# Altium PCB WCH_hairDrierCore_V1.5.PcbDoc (part 2 of 7)
Units mil, origin at the board's own origin, x right, y up, seen from the top; angles counter-clockwise.
Board outline 1683.54 x 992.13 mil, 4 copper layers (Top Layer, Mid-Layer 1, Mid-Layer 2, Bottom Layer); 84 components, 65 nets, 249 pads, 160 vias.
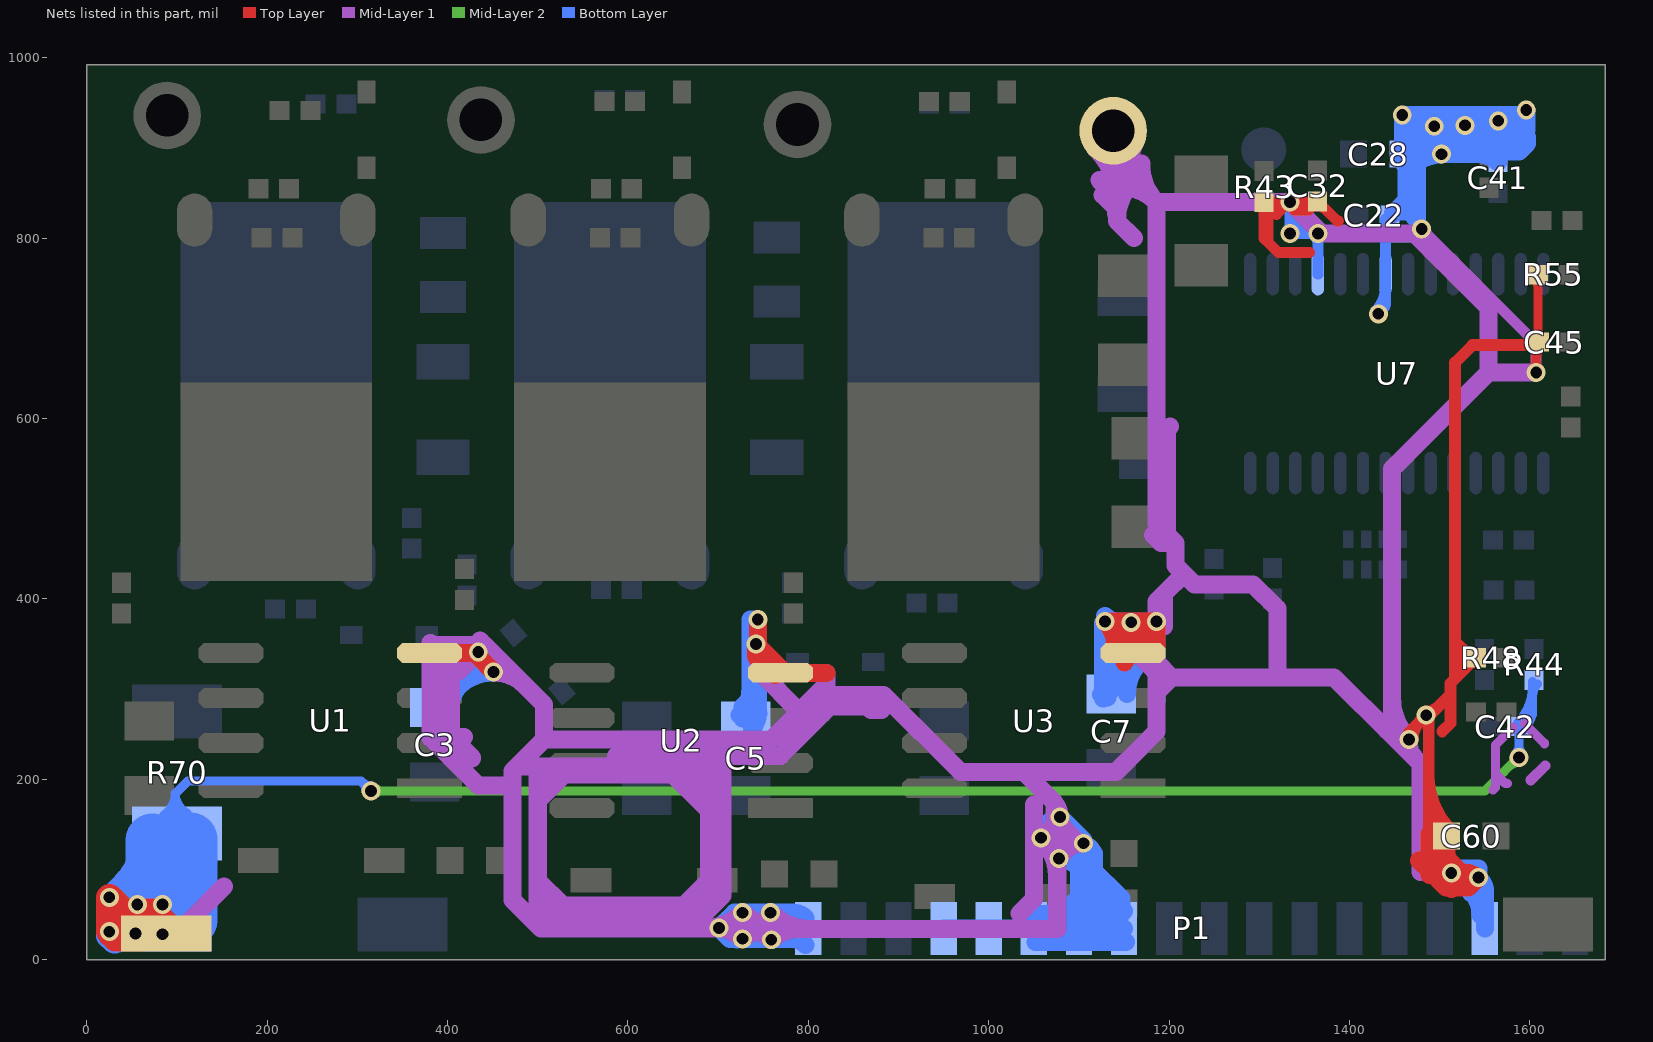
[diagram p4: the nets of this part, all layers, seen from the top]

## Via types
v1: diameter 21, hole 13, Top Layer to Bottom Layer, tented both sides, 155 vias
v2: diameter 25, hole 15, Top Layer to Bottom Layer, tented both sides, 5 vias

## Nets (pads, with @x,y where several pads share a name; then routed paths per layer and width w, separated by ;. In a path a pad name is that pad's centre, name@x,y a point inside that pad or via, vN(x,y) a via of type N, cw(c..) or ccw(c..) an arc to the next point about the centre after c; other vN are vias at no path point) (continued)
GND: C3.2 C5.2 C7.2 C22.2 C28.2 C32.2 C41.2 C42.1 C45.1 C60.2 P1.3 P1.11 P1.12 P1.13 P1.14 P1.15 P1.18 pad.0@88,29 pad.0@88,39 pad.1@1138,919 R43.1 R44.1 R48.1 R55.2 R70.1 U1.4 U2.4 U3.4 U7.4 U7.7 | length 35226.6
  Top Layer w10: 1496,96 1509,96 1524,96 ; v1@1607,655 1607,681.49 C45.1@1610.14,684.63 ; C45.1@1608.78,685.98 R55.2@1608.78,759.37 ; 1499.72,96 cw(c1499.72,82.72) v1@1509.11,92.11 ; 1499.72,96 ccw(c1499.72,109.28) v1@1509.11,99.89 ; 1499.72,96 cw(c1499.72,82.72) v1@1509.11,92.11 ; 1499.72,96 ccw(c1499.72,109.28) v1@1509.11,99.89 ; 1499.72,96 ccw(c1499.72,109.28) v1@1509.11,99.89 ; 1499.72,96 cw(c1499.72,82.72) v1@1509.11,92.11 ; v1@1517.4,92.7 cw(c1524,87.75) 1524,96 ; v1@1517.4,92.7 cw(c1524,87.75) 1524,96 ; v1@1517.4,92.7 cw(c1524,87.75) 1524,96 ; v1@1517.4,99.3 ccw(c1524,104.25) 1524,96 ; v1@1517.4,99.3 ccw(c1524,104.25) 1524,96 ; v1@1517.4,99.3 ccw(c1524,104.25) 1524,96 ; v1@1603.11,654.89 ccw(c1593.72,664.28) 1607,664.28 ; v1@1603.11,654.89 ccw(c1593.72,664.28) 1607,664.28 ; v1@1603.11,654.89 ccw(c1593.72,664.28) 1607,664.28 ; R55.2@1604.8,755.39 cw(c1595.19,745.78) 1608.79,745.78 ; R55.2@1604.8,755.39 cw(c1595.19,745.78) 1608.79,745.78 ; R55.2@1604.8,755.39 cw(c1595.19,745.78) 1608.79,745.78 ; C45.1@1605.65,688.61 ccw(c1598.08,696.18) 1608.78,696.18 ; C45.1@1605.65,688.61 ccw(c1598.08,696.18) 1608.78,696.18 ; C45.1@1605.65,688.61 ccw(c1598.08,696.18) 1608.78,696.18 ; 1607,664.28 ccw(c1620.28,664.28) v1@1610.89,654.89 ; 1607,664.28 ccw(c1620.28,664.28) v1@1610.89,654.89 ; 1607,664.28 ccw(c1620.28,664.28) v1@1610.89,654.89 ; 1607,664.69 cw(c1629.57,664.69) C45.1@1613.61,680.65 ; 1607,664.69 cw(c1629.57,664.69) C45.1@1613.61,680.65 ; 1607,664.69 cw(c1629.57,664.69) C45.1@1613.61,680.65 ; 1608.79,700.26 ccw(c1625.26,700.26) C45.1@1613.61,688.61 ; 1608.79,700.26 ccw(c1625.26,700.26) C45.1@1613.61,688.61 ; 1608.79,700.26 ccw(c1625.26,700.26) C45.1@1613.61,688.61 ; 1608.78,745.78 cw(c1622.38,745.78) R55.2@1612.77,755.39 ; 1608.78,745.78 cw(c1622.38,745.78) R55.2@1612.77,755.39 ; 1608.78,745.78 cw(c1622.38,745.78) R55.2@1612.77,755.39
  Top Layer w12: 1305.37,810.63 R43.1@1305.37,840.13 ; R43.1@1312,833 1309.5,830.5 1309.5,795.5 ; 1319,826 1320,827 ; v1@1339,835.13 v1(1334,840.13) ; 1356,784 1321,784 1309.5,795.5 ; C32.2@1363.98,840.13 1320,840.13 ; 1388,819 1386.41,819 C32.2@1364.63,840.79 C32.2@1354.84,831 ; R43.1@1302.1,836.36 cw(c1294.19,828.45) 1305.37,828.45 ; R43.1@1302.1,836.36 cw(c1294.19,828.45) 1305.37,828.45 ; R43.1@1302.1,836.36 cw(c1294.19,828.45) 1305.37,828.45 ; 1305.37,828.45 cw(c1316.55,828.45) R43.1@1308.64,836.36 ; 1305.37,828.45 cw(c1316.55,828.45) R43.1@1308.64,836.36 ; 1305.37,828.45 cw(c1316.55,828.45) R43.1@1308.64,836.36 ; R43.1@1305.37,840.13 1305.37,799.63 1309.5,795.5 ; R43.1@1305.37,840.13 1320,840.13 ; R43.1@1305.37,840.13 1320,840.13 ; R43.1@1305.37,840.13 v1(1334,840.13) ; R43.1@1305.37,840.13 v1(1334,840.13) ; R43.1@1308.64,836.86 cw(c1316.55,828.96) 1316.55,840.13 ; R43.1@1308.64,836.86 cw(c1316.55,828.96) 1316.55,840.13 ; R43.1@1308.64,836.86 cw(c1316.55,828.96) 1316.55,840.13 ; R43.1@1308.64,836.86 cw(c1316.55,828.96) 1316.55,840.13 ; R43.1@1308.64,836.86 cw(c1316.55,828.96) 1316.55,840.13 ; R43.1@1308.64,836.86 cw(c1316.55,828.96) 1316.55,840.13 ; R43.1@1308.64,836.86 cw(c1316.55,828.96) 1316.55,840.13 ; R43.1@1308.64,836.86 cw(c1316.55,828.96) 1316.55,840.13 ; R43.1@1308.64,836.86 cw(c1316.55,828.96) 1316.55,840.13 ; R43.1@1308.64,836.86 cw(c1316.55,828.96) 1316.55,840.13 ; R43.1@1308.64,836.86 cw(c1316.55,828.96) 1316.55,840.13 ; R43.1@1308.64,836.86 cw(c1316.55,828.96) 1316.55,840.13 ; R43.1@1308.64,843.41 ccw(c1316.55,851.31) 1316.55,840.13 ; R43.1@1308.64,843.41 ccw(c1316.55,851.31) 1316.55,840.13 ; R43.1@1308.64,843.41 ccw(c1316.55,851.31) 1316.55,840.13 ; R43.1@1308.64,843.41 ccw(c1316.55,851.31) 1316.55,840.13 ; R43.1@1308.64,843.41 ccw(c1316.55,851.31) 1316.55,840.13 ; R43.1@1308.64,843.41 ccw(c1316.55,851.31) 1316.55,840.13 ; R43.1@1308.64,843.41 ccw(c1316.55,851.31) 1316.55,840.13 ; R43.1@1308.64,843.41 ccw(c1316.55,851.31) 1316.55,840.13 ; R43.1@1308.64,843.41 ccw(c1316.55,851.31) 1316.55,840.13 ; R43.1@1308.64,843.41 ccw(c1316.55,851.31) 1316.55,840.13 ; R43.1@1308.64,843.41 ccw(c1316.55,851.31) 1316.55,840.13 ; R43.1@1308.64,843.41 ccw(c1316.55,851.31) 1316.55,840.13 ; 1320,827 1333.14,840.13 v1(1334,840.13) ; 1320,827 1320,840.13 ; 1323.14,840.13 cw(c1323.14,829.27) v1@1330.82,836.95 ; 1323.14,840.13 ccw(c1323.14,851) v1@1330.82,843.32 ; 1323.14,840.13 cw(c1323.14,829.27) v1@1330.82,836.95 ; 1323.14,840.13 ccw(c1323.14,851) v1@1330.82,843.32 ; 1323.14,840.13 cw(c1323.14,829.27) v1@1330.82,836.95 ; 1323.14,840.13 ccw(c1323.14,851) v1@1330.82,843.32 ; 1323.14,840.13 cw(c1323.14,829.27) v1@1330.82,836.95 ; 1323.14,840.13 ccw(c1323.14,851) v1@1330.82,843.32 ; 1323.14,840.13 cw(c1323.14,829.27) v1@1330.82,836.95 ; 1323.14,840.13 ccw(c1323.14,851) v1@1330.82,843.32 ; 1323.14,840.13 cw(c1323.14,829.27) v1@1330.82,836.95 ; 1323.14,840.13 ccw(c1323.14,851) v1@1330.82,843.32 ; 1323.14,840.13 cw(c1323.14,829.27) v1@1330.82,836.95 ; 1323.14,840.13 ccw(c1323.14,851) v1@1330.82,843.32 ; 1323.14,840.13 cw(c1323.14,829.27) v1@1330.82,836.95 ; 1323.14,840.13 ccw(c1323.14,851) v1@1330.82,843.32 ; 1323.14,840.13 cw(c1323.14,829.27) v1@1330.82,836.95 ; 1323.14,840.13 ccw(c1323.14,851) v1@1330.82,843.32 ; 1323.14,840.13 cw(c1323.14,829.27) v1@1330.82,836.95 ; 1323.14,840.13 ccw(c1323.14,851) v1@1330.82,843.32 ; 1323.14,840.13 ccw(c1323.14,851) v1@1330.82,843.32 ; 1323.14,840.13 cw(c1323.14,829.27) v1@1330.82,836.95 ; 1323.14,840.13 ccw(c1323.14,851) v1@1330.82,843.32 ; 1323.14,840.13 cw(c1323.14,829.27) v1@1330.82,836.95 ; 1323.14,840.13 ccw(c1323.14,851) v1@1330.82,843.32 ; 1323.14,840.13 cw(c1323.14,829.27) v1@1330.82,836.95 ; 1323.14,840.13 ccw(c1323.14,851) v1@1330.82,843.32 ; 1323.14,840.13 cw(c1323.14,829.27) v1@1330.82,836.95 ; 1323.14,840.13 ccw(c1323.14,851) v1@1330.82,843.32 ; 1323.14,840.13 cw(c1323.14,829.27) v1@1330.82,836.95 ; v1@1337.18,836.95 cw(c1344.86,829.27) 1344.86,840.13 ; v1@1337.18,836.95 cw(c1344.86,829.27) 1344.86,840.13 ; v1@1337.18,836.95 cw(c1344.86,829.27) 1344.86,840.13 ; v1@1337.18,843.32 ccw(c1344.86,851) 1344.86,840.13 ; v1@1337.18,843.32 ccw(c1344.86,851) 1344.86,840.13 ; v1@1337.18,843.32 ccw(c1344.86,851) 1344.86,840.13 ; v1@1338.12,841.94 ccw(c1354.84,849.25) C32.2@1354.84,831 ; v1@1338.12,841.94 ccw(c1354.84,849.25) C32.2@1354.84,831 ; v1@1338.12,841.94 ccw(c1354.84,849.25) C32.2@1354.84,831 ; v1@1339,831 ccw(c1339,856.94) C32.2@1360.75,842.8 ; v1@1339,831 ccw(c1339,856.94) C32.2@1360.75,842.8 ; v1@1339,831 ccw(c1339,856.94) C32.2@1360.75,842.8 ; v1@1339,831 C32.2@1354.84,831 ; 1353.1,840.13 ccw(c1353.1,851.81) C32.2@1361.36,843.55 ; 1353.1,840.13 ccw(c1353.1,851.81) C32.2@1361.36,843.55 ; 1353.1,840.13 ccw(c1353.1,851.81) C32.2@1361.36,843.55 ; 1353.8,840.13 cw(c1353.8,829.45) C32.2@1361.36,837.01 ; 1353.8,840.13 cw(c1353.8,829.45) C32.2@1361.36,837.01 ; 1353.8,840.13 cw(c1353.8,829.45) C32.2@1361.36,837.01 ; C32.2@1364.63,835.65 cw(c1364.63,823.25) C32.2@1373.4,832.02 ; C32.2@1364.63,835.65 cw(c1364.63,823.25) C32.2@1373.4,832.02 ; C32.2@1364.63,835.65 cw(c1364.63,823.25) C32.2@1373.4,832.02
  Top Layer w13: v1(1466,244) 1466,252 v1(1485,271) ; 1488,140.5 1488,270 1512,294 ; 1503,253 1512,262 1512,294 ; 1517,311.5 1517,353 ; R48.1@1540.14,334.63 R48.1@1529.75,324.25 ; C45.1@1607,681.49 1536.49,681.49 1517,662 1517,353 ; v1@1470,244 cw(c1498.97,244) v1@1478.49,264.49 ; v1@1470,244 cw(c1498.97,244) v1@1478.49,264.49 ; v1@1470,244 cw(c1498.97,244) v1@1478.49,264.49 ; v1@1482.17,268.17 cw(c1468.1,254.1) 1488,254.1 ; v1@1482.17,268.17 cw(c1468.1,254.1) 1488,254.1 ; v1@1482.17,268.17 cw(c1468.1,254.1) 1488,254.1 ; v1@1485,275 ccw(c1485,294.31) 1498.66,280.66 ; v1@1485,275 ccw(c1485,294.31) 1498.66,280.66 ; v1@1485,275 ccw(c1485,294.31) 1498.66,280.66 ; 1488,141.83 ccw(c1512.33,141.83) C60.2@1495.13,124.63 ; 1488,141.83 ccw(c1512.33,141.83) C60.2@1495.13,124.63 ; 1488,141.83 ccw(c1512.33,141.83) C60.2@1495.13,124.63 ; 1488,173.21 ccw(c1543.71,173.21) C60.2@1504.32,133.82 ; 1488,173.21 ccw(c1543.71,173.21) C60.2@1504.32,133.82 ; 1488,173.21 ccw(c1543.71,173.21) C60.2@1504.32,133.82 ; 1488,204.6 ccw(c1575.1,204.6) C60.2@1513.51,143.01 ; 1488,204.6 ccw(c1575.1,204.6) C60.2@1513.51,143.01 ; 1488,204.6 ccw(c1575.1,204.6) C60.2@1513.51,143.01 ; 1512,294 1512,306.5 R48.1@1529.75,324.25 ; 1517,353 1529.75,340.25 R48.1@1529.75,324.25 ; 1525.31,344.69 ccw(c1539.63,359.02) R48.1@1539.63,338.76 ; 1525.31,344.69 ccw(c1539.63,359.02) R48.1@1539.63,338.76 ; 1525.31,344.69 ccw(c1539.63,359.02) R48.1@1539.63,338.76 ; R48.1@1532.22,326.72 ccw(c1524.31,334.63) R48.1@1535.5,334.63 ; R48.1@1532.22,326.72 ccw(c1524.31,334.63) R48.1@1535.5,334.63 ; R48.1@1532.22,326.72 ccw(c1524.31,334.63) R48.1@1535.5,334.63 ; 1592.09,681.5 ccw(c1592.09,702.17) C45.1@1606.71,687.55 ; 1592.09,681.5 ccw(c1592.09,702.17) C45.1@1606.71,687.55 ; 1592.09,681.5 ccw(c1592.09,702.17) C45.1@1606.71,687.55
  Top Layer w20: U1.4@380,340 433,340 433,337 v1(451,319) ; v1@744,343 v1(744,377) ; 820,318 U2.4@769,318 ; 1140,364 1140,352 ; U3.4@1158,342 v1(1158,374) ; U3.4@1158,350 1154,350 1137.5,366.5 v1(1129,375) 1174,375 ; U3.4@1186,342 v1@1186,374 ; 1477,110 1489,98 ; 1489,139.5 1489,98 ; 1496,105 C60.2@1496,125 ; C60.2@1496,132.5 C60.2@1496,125 ; v1@1507.5,96.5 1507.5,113 ; C60.2@1507.5,126 1496,114.5 ; C60.2@1507.5,142 1507.5,113 ; v1@1518,102 1529,91 v1(1543,91) ; v1@742.5,350 ccw(c777.51,350) U2.4@752.75,325.25 ; v1@742.5,350 ccw(c777.51,350) U2.4@752.75,325.25 ; v1@742.5,350 ccw(c777.51,350) U2.4@752.75,325.25 ; U2.4@769,318 769,323 v1(742,350) 742,336 760,318 U2.4@769,318 ; v1@1128.67,374.63 cw(c1106.49,349.51) U3.4@1140,349.51 ; v1@1128.67,374.63 cw(c1106.49,349.51) U3.4@1140,349.51 ; v1@1128.67,374.63 cw(c1106.49,349.51) U3.4@1140,349.51 ; v1@1128.85,374.52 cw(c1124.23,359.44) 1140,359.44 ; v1@1128.85,374.52 cw(c1124.23,359.44) 1140,359.44 ; v1@1128.85,374.52 cw(c1124.23,359.44) 1140,359.44 ; U3.4@1134.29,340.71 ccw(c1120.51,354.49) 1140,354.49 ; U3.4@1134.29,340.71 ccw(c1120.51,354.49) 1140,354.49 ; U3.4@1134.29,340.71 ccw(c1120.51,354.49) 1140,354.49 ; U3.4@1134.4,340.8 ccw(c1126,352) 1140,352 ; U3.4@1134.4,340.8 ccw(c1126,352) 1140,352 ; U3.4@1134.4,340.8 ccw(c1126,352) 1140,352 ; 1140,352 1144,356 U3.4@1160,340 v1@1186,366 ; 1147.64,356.36 cw(c1132.06,340.77) U3.4@1153.38,335.18 ; 1147.64,356.36 cw(c1132.06,340.77) U3.4@1153.38,335.18 ; 1147.64,356.36 cw(c1132.06,340.77) U3.4@1153.38,335.18 ; 1148.63,351.37 cw(c1136.35,339.09) U3.4@1150.74,329.35 ; 1148.63,351.37 cw(c1136.35,339.09) U3.4@1150.74,329.35 ; 1148.63,351.37 cw(c1136.35,339.09) U3.4@1150.74,329.35 ; v1@1157.79,373.54 cw(c1146.37,348.39) U3.4@1174,348.39 ; v1@1157.79,373.54 cw(c1146.37,348.39) U3.4@1174,348.39 ; v1@1157.79,373.54 cw(c1146.37,348.39) U3.4@1174,348.39 ; U3.4@1174,350.81 cw(c1203.15,350.81) v1@1186.29,374.59 ; U3.4@1174,350.81 cw(c1203.15,350.81) v1@1186.29,374.59 ; U3.4@1174,350.81 cw(c1203.15,350.81) v1@1186.29,374.59 ; 1174,354 ccw(c1187.17,354) U3.4@1185.15,340.99 ; 1174,354 ccw(c1187.17,354) U3.4@1185.15,340.99 ; 1174,354 ccw(c1187.17,354) U3.4@1185.15,340.99 ; 1174,354 1174,375 ; 1174,368.97 ccw(c1213.97,368.97) U3.4@1185.71,340.71 ; 1174,368.97 ccw(c1213.97,368.97) U3.4@1185.71,340.71 ; 1174,368.97 ccw(c1213.97,368.97) U3.4@1185.71,340.71 ; 1174,375 v1(1186,375) v1@1186,366 ; 1178.78,358.78 ccw(c1162.57,375) v1@1185.5,375 ; 1178.78,358.78 ccw(c1162.57,375) v1@1185.5,375 ; 1178.78,358.78 ccw(c1162.57,375) v1@1185.5,375 ; U3.4@1185.72,340.69 cw(c1198.8,353.2) v1@1186,366 ; U3.4@1185.72,340.69 cw(c1198.8,353.2) v1@1186,366 ; U3.4@1185.72,340.69 cw(c1198.8,353.2) v1@1186,366 ; 1486,101 ccw(c1502.6,117.6) v1@1512.78,96.45 ; 1486,101 ccw(c1502.6,117.6) v1@1512.78,96.45 ; 1486,101 ccw(c1502.6,117.6) v1@1512.78,96.45 ; 1489,93.84 cw(c1535.39,93.84) C60.2@1510.21,132.8 ; 1489,93.84 cw(c1535.39,93.84) C60.2@1510.21,132.8 ; 1489,93.84 cw(c1535.39,93.84) C60.2@1510.21,132.8 ; 1489,98 1507,80 1515,80 ; 1489,130.57 cw(c1511.65,130.57) C60.2@1499.36,149.6 ; 1489,130.57 cw(c1511.65,130.57) C60.2@1499.36,149.6 ; 1489,130.57 cw(c1511.65,130.57) C60.2@1499.36,149.6 ; 1496,98.26 cw(c1544.74,98.26) C60.2@1510.96,133.4 ; 1496,98.26 cw(c1544.74,98.26) C60.2@1510.96,133.4 ; 1496,98.26 cw(c1544.74,98.26) C60.2@1510.96,133.4 ; 1496,98.26 cw(c1544.74,98.26) C60.2@1510.96,133.4 ; 1496,98.26 cw(c1544.74,98.26) C60.2@1510.96,133.4 ; 1496,98.26 cw(c1544.74,98.26) C60.2@1510.96,133.4 ; 1496,100 C60.2@1496,125 ; 1496,100 1496,114.5 ; 1496,100 1496,96 1509,96 1524,96 1507.5,112.5 1507.5,113 ; 1496,103 cw(c1534.29,103) C60.2@1510.59,133.07 ; 1496,103 cw(c1534.29,103) C60.2@1510.59,133.07 ; 1496,103 cw(c1534.29,103) C60.2@1510.59,133.07 ; 1496,111.73 cw(c1518.6,111.73) C60.2@1509.51,132.42 ; 1496,111.73 cw(c1518.6,111.73) C60.2@1509.51,132.42 ; 1496,111.73 cw(c1518.6,111.73) C60.2@1509.51,132.42 ; 1496,114.5 ccw(c1514.03,114.5) v1@1513.03,96.5 ; 1496,114.5 ccw(c1514.03,114.5) v1@1513.03,96.5 ; 1496,114.5 ccw(c1514.03,114.5) v1@1513.03,96.5 ; C60.2@1496,125 ccw(c1528.28,125) v1@1513.23,96.44 ; C60.2@1496,125 ccw(c1528.28,125) v1@1513.23,96.44 ; C60.2@1496,125 ccw(c1528.28,125) v1@1513.23,96.44 ; C60.2@1496,125 ccw(c1528.28,125) v1@1513.23,96.44 ; C60.2@1496,125 ccw(c1528.28,125) v1@1513.23,96.44 ; C60.2@1496,125 ccw(c1528.28,125) v1@1513.23,96.44 ; 1501.5,120 ccw(c1493.2,128.3) C60.2@1503.23,134.4 ; 1501.5,120 ccw(c1493.2,128.3) C60.2@1503.23,134.4 ; 1501.5,120 ccw(c1493.2,128.3) C60.2@1503.23,134.4 ; 1504.37,115.63 cw(c1484.74,96) v1@1512.5,96 ; 1504.37,115.63 cw(c1484.74,96) v1@1512.5,96 ; 1504.37,115.63 cw(c1484.74,96) v1@1512.5,96 ; 1507.5,110.49 ccw(c1527.49,110.49) v1@1513.35,96.35 ; 1507.5,110.49 ccw(c1527.49,110.49) v1@1513.35,96.35 ; 1507.5,110.49 ccw(c1527.49,110.49) v1@1513.35,96.35 ; 1507.5,110.49 ccw(c1527.49,110.49) v1@1513.35,96.35 ; 1507.5,110.49 ccw(c1527.49,110.49) v1@1513.35,96.35 ; 1507.5,110.49 ccw(c1527.49,110.49) v1@1513.35,96.35 ; 1507.5,110.49 ccw(c1527.49,110.49) v1@1513.35,96.35 ; 1507.5,110.49 ccw(c1527.49,110.49) v1@1513.35,96.35 ; 1507.5,110.49 ccw(c1527.49,110.49) v1@1513.35,96.35 ; 1507.5,110.49 ccw(c1527.49,110.49) v1@1513.35,96.35 ; 1507.5,110.49 ccw(c1527.49,110.49) v1@1513.35,96.35 ; 1507.5,110.49 ccw(c1527.49,110.49) v1@1513.35,96.35 ; 1507.5,110.49 ccw(c1527.49,110.49) v1@1513.35,96.35 ; 1507.5,110.49 ccw(c1527.49,110.49) v1@1513.35,96.35 ; 1507.5,110.49 ccw(c1527.49,110.49) v1@1513.35,96.35 ; C60.2@1511.19,133.62 ccw(c1524.73,121.23) 1511.75,108.25 ; C60.2@1511.19,133.62 ccw(c1524.73,121.23) 1511.75,108.25 ; C60.2@1511.19,133.62 ccw(c1524.73,121.23) 1511.75,108.25 ; v1@1513,95.5 cw(c1513,67.74) 1532.63,87.37 ; v1@1513,95.5 cw(c1513,67.74) 1532.63,87.37 ; v1@1513,95.5 cw(c1513,67.74) 1532.63,87.37 ; v1@1513.1,95.51 cw(c1516.59,77.59) 1529.5,90.5 ; v1@1513.1,95.51 cw(c1516.59,77.59) 1529.5,90.5 ; v1@1513.1,95.51 cw(c1516.59,77.59) 1529.5,90.5 ; 1513.13,78.13 cw(c1543,48.25) v1@1543,90.5 ; 1513.13,78.13 cw(c1543,48.25) v1@1543,90.5 ; 1513.13,78.13 cw(c1543,48.25) v1@1543,90.5 ; v1@1513.35,96.35 ccw(c1526.28,109.28) 1526.28,91 ; v1@1513.35,96.35 ccw(c1526.28,109.28) 1526.28,91 ; v1@1513.35,96.35 ccw(c1531.11,114.11) 1531.11,89 ; v1@1513.35,96.35 ccw(c1526.28,109.28) 1526.28,91 ; v1@1513.35,96.35 ccw(c1526.28,109.28) 1526.28,91 ; v1@1513.35,96.35 ccw(c1531.11,114.11) 1531.11,89 ; v1@1513.35,96.35 ccw(c1526.28,109.28) 1526.28,91 ; v1@1513.35,96.35 ccw(c1526.28,109.28) 1526.28,91 ; v1@1513.35,96.35 ccw(c1531.11,114.11) 1531.11,89 ; v1@1513.47,96.18 ccw(c1524,100.32) 1524,89 ; v1@1513.47,96.18 ccw(c1524,100.32) 1524,89 ; v1@1513.47,96.18 ccw(c1524,100.32) 1524,89 ; v1@1513.5,96.07 ccw(c1532,98.69) 1532,80 ; v1@1513.5,96.07 ccw(c1532,98.69) 1532,80 ; v1@1513.5,96.07 ccw(c1532,98.69) 1532,80 ; 1515,80 1532,80 ; 1515,80 1524,89 ; 1515.24,80 ccw(c1515.24,118.76) v1@1542.65,91.35 ; 1515.24,80 ccw(c1515.24,118.76) v1@1542.65,91.35 ; 1515.24,80 ccw(c1515.24,118.76) v1@1542.65,91.35 ; 1515.5,80.5 cw(c1539.96,56.04) v1@1542.96,90.5 ; 1515.5,80.5 cw(c1539.96,56.04) v1@1542.96,90.5 ; 1515.5,80.5 cw(c1539.96,56.04) v1@1542.96,90.5 ; v1@1518.25,101.75 ccw(c1543,126.51) v1@1543,91.5 ; v1@1518.25,101.75 ccw(c1543,126.51) v1@1543,91.5 ; v1@1518.25,101.75 ccw(c1543,126.51) v1@1543,91.5 ; 1524,89 1541,89 1532,80 ; 1525,95 ccw(c1536.55,106.55) v1@1542.81,91.46 ; 1525,95 ccw(c1536.55,106.55) v1@1542.81,91.46 ; 1525,95 ccw(c1536.55,106.55) v1@1542.81,91.46 ; 1529.72,96 cw(c1529.72,77.72) v1@1542.65,90.65 ; 1529.72,96 cw(c1529.72,77.72) v1@1542.65,90.65 ; 1529.72,96 cw(c1529.72,77.72) v1@1542.65,90.65 ; 1529.72,96 cw(c1529.72,77.72) v1@1542.65,90.65 ; 1529.72,96 cw(c1529.72,77.72) v1@1542.65,90.65 ; 1529.72,96 cw(c1529.72,77.72) v1@1542.65,90.65 ; 755.81,336.19 cw(c738.35,318.72) 762.85,315.59 ccw(c738.35,318.72) 755.81,336.19
  Top Layer w30: v1@31.44,35 cw(c31.44,2.44) pad.0@54.46,25.46 ; pad.0@61,24 32,24 v1(25,31) ; pad.0@82,35 29,35 v1(25,31) ; pad.0@88,29 88,39 74,53 41,53 v1(25,69) v1(25,31)
  Mid-Layer 1 w10: 1559,188 1562,191 1562,206 ; 1575,195 1573,195 1562,206 ; 1582,258 1562,238 1562,206 ; 1594,262 1616,240 1616,239
  Mid-Layer 1 w12: 1142,836 1142,817 1152,807 ; v1(1480,810) 1607,683 v1(1607,651) ; 1601,199 1617,215 ; v1@1480,805.5 cw(c1480,794.64) 1487.68,802.32 ; v1@1480,805.5 cw(c1480,794.64) 1487.68,802.32 ; v1@1480,805.5 cw(c1480,794.64) 1487.68,802.32 ; v1@1484.5,810 ccw(c1495.36,810) 1487.68,802.32 ; v1@1484.5,810 ccw(c1495.36,810) 1487.68,802.32 ; v1@1484.5,810 ccw(c1495.36,810) 1487.68,802.32 ; v1@1603.82,654.18 ccw(c1596.14,661.86) 1607,661.86 ; v1@1603.82,654.18 ccw(c1596.14,661.86) 1607,661.86 ; v1@1603.82,654.18 ccw(c1596.14,661.86) 1607,661.86 ; 1607,661.86 ccw(c1617.86,661.86) v1@1610.18,654.18 ; 1607,661.86 ccw(c1617.86,661.86) v1@1610.18,654.18 ; 1607,661.86 ccw(c1617.86,661.86) v1@1610.18,654.18
  Mid-Layer 1 w20: 113,42 152,81 ; 392.5,316 417.5,341 v1(434,341) ; 402.5,320 413,320 v1(434,341) ; 404,320 404,247 ; 418,247 404,247 ; 421,349 v1(451,319) ; 427,223 427,224 404,247 ; 465,193 434,193 392.5,234.5 ; 500,47.26 500,54 ; 500,53.61 500,61 ; 512,42 500,54 ; 530,214 521,205 ; 538,214 500,176 ; 541,34.61 500,75.61 500,88 ; 587,226 769,226 823.5,280.5 865.98,280.5 869.48,277 881,277 ; 649.61,34.61 690,75 690,214 ; 656.03,47 541,47 528,60 ; 666,205 521,205 ; 675,60 528,60 ; 679,45 705,71 705,214 690,214 ; 690,87.61 637,34.61 ; 690,165 641,214 ; 690,181 657,214 652,214 ; v1(727,23) 727,29 732,34 ; v1(744,377) 744,321 792.5,272.5 815.5,272.5 ; v1(759,22) 746.39,34.61 ; 815,300 ccw(c802.28,312.72) 819.52,317.86 ; 820,318 820,305 808.5,293.5 ; 1034,51 1050,67 1050,172 ; v1(1078,112) 1073,117 v1@1073,156 ; v1@1100,129 v1@1073,156 ; pad.1@1118.55,899.55 cw(c1061.95,842.95) 1142,842.95 ; pad.1@1124.03,895.31 cw(c1105.48,863.86) 1142,863.86 cw(c1190.95,863.86) pad.1@1157.05,899.16 ; pad.1@1135,884 pad.1@1142,884 ; 1142,832 1126,848 1142,864 pad.1@1142,884 ; 1142,862.27 cw(c1194.73,862.27) pad.1@1157.45,899.55 ; pad.1@1144.67,915.56 ccw(c1175.6,899.62) 1150.99,875.01 ; v1(1158,374) 1181,351 1186,351 ; 1161,800 1142,819 ; pad.1@1162.44,906.4 ccw(c1201.17,886.44) 1170.36,855.64 ; 1181,334 1140,375 ; 1182,471 1191,462 1207,462 ; 1186,295 1186,296 1203,313 1186,330 1186,332 ; 1186,313 1259,313 1383,313 1447,249 ; 1186,321 1183,321 v1(1129,375) 1140,375 ; v1@1194.39,369.39 1194.39,405.61 ; 1201,591 1197.5,587.5 1197.5,471.5 ; 1320,314 1320,389 1293,416 1228,416 1216,428 ; v1(1365,805) 1382,805 ; 1479,97 1479,217 1447,249 ; v1(1607,651) 1554,651 ; 392.5,234.5 381,246 381,351 383,349 441,349 507,283 507,244 ; 392.5,234.5 392.5,339.5 394,341 v1(434,341) ; 413.48,349 cw(c413.48,320.48) v1@433.65,340.65 ; 413.48,349 cw(c413.48,320.48) v1@433.65,340.65 ; 413.48,349 cw(c413.48,320.48) v1@433.65,340.65 ; v1@434,340.5 cw(c434,303.08) 460.46,329.54 ; v1@434,340.5 ccw(c434,299.46) 404.98,328.48 cw(c434,299.46) v1@434,340.5 ; v1@434,340.5 cw(c434,303.08) 460.46,329.54 ; v1@434,340.5 cw(c434,303.08) 460.46,329.54 ; 436,354 cw(c401.01,319) v1@450.5,319 ; 436,354 cw(c401.01,319) v1@450.5,319 ; 436,354 cw(c401.01,319) v1@450.5,319 ; v1@451,318.5 cw(c451,269.01) 486,304 ; v1@451,318.5 cw(c451,269.01) 486,304 ; v1@451,318.5 cw(c451,269.01) 486,304 ; 477,214 472,209 472,66 503.39,34.61 637,34.61 ; 477,214 507,244 ; 477,214 500,214 ; 500,54 500,61 ; 500,61 500,88 ; 500,88 500,176 ; 500,88 528,60 ; 500,176 500,214 ; 500,176 500,184 521,205 ; 500,214 641,214 ; 507,244 759,244 808.5,293.5 ; 637,34.61 746.39,34.61 ; 641,214 652,214 ; 652,214 690,214 ; 683.81,34.61 ccw(c683.81,95.19) v1@726.65,52.35 ; 683.81,34.61 ccw(c683.81,95.19) v1@726.65,52.35 ; 683.81,34.61 ccw(c683.81,95.19) v1@726.65,52.35 ; v1@697.77,34.61 cw(c697.77,-6.23) v1@726.65,22.65 ; v1@697.77,34.61 cw(c697.77,-6.23) v1@726.65,22.65 ; v1@697.77,34.61 cw(c697.77,-6.23) v1@726.65,22.65 ; v1@727.35,22.65 cw(c754.76,-4.76) 754.76,34 ; v1@727.35,22.65 cw(c754.76,-4.76) 754.76,34 ; v1@727.35,22.65 cw(c754.76,-4.76) 754.76,34 ; 727.35,34.61 cw(c727.35,-9.65) v1@758.65,21.65 ; 727.35,34.61 cw(c727.35,-9.65) v1@758.65,21.65 ; 727.35,34.61 cw(c727.35,-9.65) v1@758.65,21.65 ; v1@727.35,52.35 ccw(c771.66,96.66) 771.66,34 ; v1@727.35,52.35 ccw(c771.66,96.66) 771.66,34 ; v1@727.35,52.35 ccw(c771.66,96.66) 771.66,34 ; v1@727.45,22.78 cw(c746.39,13.53) 746.39,34.61 ; v1@727.45,22.78 cw(c746.39,13.53) 746.39,34.61 ; v1@727.45,22.78 cw(c746.39,13.53) 746.39,34.61 ; v1@727.5,23 cw(c742.86,23.14) 732,34 ; v1@727.5,23 cw(c742.86,23.14) 732,34 ; v1@727.5,23 cw(c742.86,23.14) 732,34 ; v1@727.5,52.04 ccw(c746.39,53.56) 746.39,34.61 ; v1@727.5,52.04 ccw(c746.39,53.56) 746.39,34.61 ; v1@727.5,52.04 ccw(c746.39,53.56) 746.39,34.61 ; 732,34 cw(c732,-0.91) v1@758.62,21.68 ; 732,34 ccw(c732,61.02) v1@757.53,52.16 ; 732,34 cw(c732,-0.91) v1@758.62,21.68 ; 732,34 ccw(c732,61.02) v1@757.53,52.16 ; 732,34 cw(c732,-0.91) v1@758.62,21.68 ; 732,34 ccw(c732,61.02) v1@757.53,52.16 ; 732,34 1076,34 1076,126 1073,129 ; v1@758.35,52.35 ccw(c802.66,96.66) 802.66,34 ; v1@758.35,52.35 ccw(c802.66,96.66) 802.66,34 ; v1@758.35,52.35 ccw(c802.66,96.66) 802.66,34 ; v1@759.35,21.65 cw(c789.18,-8.18) 789.18,34 ; v1@759.35,21.65 cw(c789.18,-8.18) 789.18,34 ; v1@759.35,21.65 cw(c789.18,-8.18) 789.18,34 ; 808.5,293.5 883.5,293.5 969,208 1039,208 ; 1039,208 1073,174 v1@1073,156 ; 1039,208 1141,208 1186,253 1186,310 1186,332 ; 1050,114.48 cw(c1078.52,114.48) v1@1058.35,134.65 ; 1050,114.48 cw(c1078.52,114.48) v1@1058.35,134.65 ; 1050,114.48 cw(c1078.52,114.48) v1@1058.35,134.65 ; 1050,155.52 ccw(c1078.52,155.52) v1@1058.35,135.35 ; 1050,155.52 ccw(c1078.52,155.52) v1@1058.35,135.35 ; 1050,155.52 ccw(c1078.52,155.52) v1@1058.35,135.35 ; v1@1057.65,134.65 cw(c1013.34,90.34) 1076,90.34 ; v1@1057.65,134.65 cw(c1013.34,90.34) 1076,90.34 ; v1@1057.65,134.65 cw(c1013.34,90.34) 1076,90.34 ; v1@1057.8,134.54 cw(c1048.04,111.57) v1@1073,111.57 ; v1@1057.8,134.54 cw(c1048.04,111.57) v1@1073,111.57 ; v1@1057.8,134.54 cw(c1048.04,111.57) v1@1073,111.57 ; v1@1057.85,135.48 ccw(c1051.53,156) v1@1073,156 ; v1@1057.85,135.48 ccw(c1051.53,156) v1@1073,156 ; v1@1057.85,135.48 ccw(c1051.53,156) v1@1073,156 ; v1@1057.96,134.5 cw(c1056.3,114.88) v1@1076,114.88 ; v1@1057.96,134.5 cw(c1056.3,114.88) v1@1076,114.88 ; v1@1057.96,134.5 cw(c1056.3,114.88) v1@1076,114.88 ; v1@1058,134.5 cw(c1058,111.57) 1074.22,127.78 ; v1@1058,134.5 cw(c1058,111.57) 1074.22,127.78 ; v1@1058,134.5 cw(c1058,111.57) 1074.22,127.78 ; v1@1058,134.5 cw(c1058,111.57) 1074.22,127.78 ; v1@1058,134.5 cw(c1058,111.57) 1074.22,127.78 ; v1@1058,134.5 cw(c1058,111.57) 1074.22,127.78 ; v1@1058.36,135.34 ccw(c1073,149.06) 1073,129 ; v1@1058.35,135.35 ccw(c1073.69,150.69) 1073.69,129 ; v1@1058.36,135.34 ccw(c1073,149.06) 1073,129 ; v1@1058.35,135.35 ccw(c1073.69,150.69) 1073.69,129 ; v1@1058.35,135.35 ccw(c1073.69,150.69) 1073.69,129 ; v1@1058.36,135.34 ccw(c1073,149.06) 1073,129 ; 1068.66,133.34 cw(c1047.32,112) v1@1077.5,112 ; 1068.66,133.34 cw(c1047.32,112) v1@1077.5,112 ; 1068.66,133.34 cw(c1047.32,112) v1@1077.5,112 ; 1070,132 cw(c1051.75,113.75) v1@1077.5,112.03 ; 1070,132 cw(c1051.75,113.75) v1@1077.5,112.03 ; 1070,132 cw(c1051.75,113.75) v1@1077.5,112.03 ; 1071.08,175.92 cw(c1053.15,158) v1@1078.5,158 ; 1071.08,175.92 cw(c1053.15,158) v1@1078.5,158 ; 1071.08,175.92 cw(c1053.15,158) v1@1078.5,158 ; 1071.08,175.92 cw(c1053.15,158) v1@1078.5,158 ; 1071.08,175.92 cw(c1053.15,158) v1@1078.5,158 ; 1071.08,175.92 cw(c1053.15,158) v1@1078.5,158 ; 1073,125.28 ccw(c1091.28,125.28) v1@1078.35,112.35 ; 1073,125.28 ccw(c1091.28,125.28) v1@1078.35,112.35 ; 1073,125.28 ccw(c1091.28,125.28) v1@1078.35,112.35 ; 1073,129 v1(1105,129) ; 1073,142.31 cw(c1094.69,142.31) v1@1079.35,157.65 ; 1073,142.31 cw(c1094.69,142.31) v1@1079.35,157.65 ; 1073,142.31 cw(c1094.69,142.31) v1@1079.35,157.65 ; 1073,173.69 ccw(c1094.69,173.69) v1@1079.35,158.35 ; 1073,173.69 ccw(c1094.69,173.69) v1@1079.35,158.35 ; 1073,173.69 ccw(c1094.69,173.69) v1@1079.35,158.35 ; v1@1078.46,111.8 cw(c1105,99.92) v1(1105,129) ; v1@1078.46,111.8 cw(c1105,99.92) v1(1105,129) ; v1@1078.46,111.8 cw(c1105,99.92) v1(1105,129) ; v1@1079.5,158 ccw(c1100.02,158) 1085.51,143.49 ; v1@1079.5,158 ccw(c1100.02,158) 1085.51,143.49 ; v1@1079.5,158 ccw(c1100.02,158) 1085.51,143.49 ; v1@1129,374.5 cw(c1129,346.74) 1148.63,366.37 ; v1@1129,374.5 cw(c1129,346.74) 1148.63,366.37 ; v1@1129,374.5 cw(c1129,346.74) 1148.63,366.37 ; v1@1129.1,374.51 cw(c1132.59,356.59) 1145.5,369.5 ; v1@1129.1,374.51 cw(c1132.59,356.59) 1145.5,369.5 ; v1@1129.1,374.51 cw(c1132.59,356.59) 1145.5,369.5 ; 1140,375 v1(1186,375) ; 1142,819 cw(c1205.06,819) 1161.15,864.26 ccw(c1205.06,819) 1142,819 ; 1142,819 ccw(c1078.94,819) 1122.85,864.26 cw(c1078.94,819) 1142,819 ; 1142,819 pad.1@1142,884 ; pad.1@1142,884 1185.86,840.13 ; v1@1158.48,373.87 ccw(c1197.59,363.59) 1169,335 ; v1@1158.48,373.87 ccw(c1197.59,363.59) 1169,335 ; v1@1158.48,373.87 ccw(c1197.59,363.59) 1169,335 ; v1@1158.5,374 ccw(c1200.75,374) 1170.87,344.13 ; v1@1158.5,374 ccw(c1200.75,374) 1170.87,344.13 ; v1@1158.5,374 ccw(c1200.75,374) 1170.87,344.13 ; v1@1185.65,375.35 ccw(c1164.53,396.47) 1194.39,396.47 ; v1@1185.65,375.35 ccw(c1164.53,396.47) 1194.39,396.47 ; v1@1185.65,375.35 ccw(c1164.53,396.47) 1194.39,396.47 ; 1185.86,840.14 cw(c1225.61,879.88) 1169.47,882.65 ccw(c1225.61,879.88) 1185.86,840.14 ; 1185.86,840.14 ccw(c1146.12,800.39) 1143.35,856.53 cw(c1146.12,800.39) 1185.86,840.14 ; 1185.86,840.13 v1(1334,840.13) 1369.14,805 1382,805 ; 1185.86,840.13 1185.86,483.13 1197.5,471.5 ; 1186,332 v1(1186,375) ; v1(1186,375) 1186,397.21 1194.39,405.61 ; 1194.39,405.61 1216,427.21 1216,428 ; 1197.5,471.5 1207,462 ; 1207,462 1207,437 1216,428 ; 1382,805 1472,805 1554,723 1554,651 ; 1441.25,254.75 ccw(c1466,279.51) v1@1466,244.5 ; 1441.25,254.75 ccw(c1466,279.51) v1@1466,244.5 ; 1441.25,254.75 ccw(c1466,279.51) v1@1466,244.5 ; 1447,249 1447,544 1554,651 ; 1447,291.08 ccw(c1513.08,291.08) v1@1466.35,244.35 ; 1447,291.08 ccw(c1513.08,291.08) v1@1466.35,244.35 ; 1447,291.08 ccw(c1513.08,291.08) v1@1466.35,244.35 ; v1@1466.49,243.88 ccw(c1486.81,238.81) 1472,224 ; v1@1466.49,243.88 ccw(c1486.81,238.81) 1472,224 ; v1@1466.49,243.88 ccw(c1486.81,238.81) 1472,224 ; 1466.72,805 ccw(c1466.72,823.28) v1@1479.65,810.35 ; 1466.72,805 ccw(c1466.72,823.28) v1@1479.65,810.35 ; 1466.72,805 ccw(c1466.72,823.28) v1@1479.65,810.35 ; v1@1480.5,810 ccw(c1513.09,810) 1490.05,786.95 ; v1@1480.5,810 ccw(c1513.09,810) 1490.05,786.95 ; v1@1480.5,810 ccw(c1513.09,810) 1490.05,786.95 ; 409.25,332.75 cw(c429.02,312.98) 433.91,340.51 ccw(c429.02,312.98) 409.25,332.75
  Mid-Layer 2 w10: v1(315,187) 1226,187 1550,187 1571.24,208.24 ; 1565,202 v1@1585,222 ; v1@318.89,183.11 cw(c328.28,173.72) 328.28,187 ; v1@318.89,183.11 cw(c328.28,173.72) 328.28,187 ; v1@318.89,183.11 cw(c328.28,173.72) 328.28,187 ; v1@318.89,190.89 ccw(c328.28,200.28) 328.28,187 ; v1@318.89,190.89 ccw(c328.28,200.28) 328.28,187 ; v1@318.89,190.89 ccw(c328.28,200.28) 328.28,187 ; 1576.9,213.9 cw(c1588,202.81) v1@1588,218.5 ; 1576.9,213.9 cw(c1588,202.81) v1@1588,218.5 ; 1576.9,213.9 cw(c1588,202.81) v1@1588,218.5 ; 1579.32,216.32 ccw(c1571.64,224) v1@1582.5,224 ; 1579.32,216.32 ccw(c1571.64,224) v1@1582.5,224 ; 1579.32,216.32 ccw(c1571.64,224) v1@1582.5,224
  Bottom Layer w10: R70.1@73,132 R70.1@100,161 ; R70.1@98,142 98,184 ; v1(315,187) 304,198 112,198 98,184 ; v1(1588,224) C42.1@1588,256.76 ; C42.1@1589.6,258.36 1603,271.76 R44.1@1603,308.5 ; R70.1@85.73,160.53 ccw(c69.42,184) 98,184 ; R70.1@85.73,160.53 ccw(c69.42,184) 98,184 ; R70.1@85.73,160.53 ccw(c69.42,184) 98,184 ; 98,184 ccw(c122.35,184) R70.1@111.32,162.29 ; 98,184 ccw(c122.35,184) R70.1@111.32,162.29 ; 98,184 ccw(c122.35,184) R70.1@111.32,162.29 ; 305.61,196.39 cw(c296.22,187) v1@309.5,187 ; 305.61,196.39 ccw(c315,205.78) v1@315,192.5 ; 305.61,196.39 cw(c296.22,187) v1@309.5,187 ; 305.61,196.39 ccw(c315,205.78) v1@315,192.5 ; 305.61,196.39 ccw(c315,205.78) v1@315,192.5 ; 305.61,196.39 cw(c296.22,187) v1@309.5,187 ; v1@1584.11,227.89 ccw(c1574.72,237.28) 1588,237.28 ; v1@1584.11,227.89 ccw(c1574.72,237.28) 1588,237.28 ; v1@1584.11,227.89 ccw(c1574.72,237.28) 1588,237.28 ; C42.1@1585.11,254.38 cw(c1578.14,247.41) 1588,247.41 ; C42.1@1585.11,254.38 cw(c1578.14,247.41) 1588,247.41 ; C42.1@1585.11,254.38 cw(c1578.14,247.41) 1588,247.41 ; C42.1@1586.12,262.34 ccw(c1545.37,303.09) R44.1@1603,303.09 ; C42.1@1586.12,262.34 ccw(c1545.37,303.09) R44.1@1603,303.09 ; C42.1@1586.12,262.34 ccw(c1545.37,303.09) R44.1@1603,303.09 ; 1588,237.28 ccw(c1601.28,237.28) v1@1591.89,227.89 ; 1588,237.28 ccw(c1601.28,237.28) v1@1591.89,227.89 ; 1588,237.28 ccw(c1601.28,237.28) v1@1591.89,227.89 ; 1588,242.13 cw(c1605.32,242.13) C42.1@1593.07,254.38 ; 1588,242.13 cw(c1605.32,242.13) C42.1@1593.07,254.38 ; 1588,242.13 cw(c1605.32,242.13) C42.1@1593.07,254.38 ; C42.1@1590.1,263.99 ccw(c1590.1,276.37) C42.1@1598.85,267.62 ; C42.1@1590.1,263.99 ccw(c1590.1,276.37) C42.1@1598.85,267.62 ; C42.1@1590.1,263.99 ccw(c1590.1,276.37) C42.1@1598.85,267.62 ; C42.1@1593.19,255.27 ccw(c1569.52,278.95) 1603,278.95 ; C42.1@1593.19,255.27 ccw(c1569.52,278.95) 1603,278.95 ; C42.1@1593.19,255.27 ccw(c1569.52,278.95) 1603,278.95 ; C42.1@1595.73,258.36 cw(c1610.54,258.36) C42.1@1600.07,268.84 ; C42.1@1595.73,258.36 cw(c1610.54,258.36) C42.1@1600.07,268.84 ; C42.1@1595.73,258.36 cw(c1610.54,258.36) C42.1@1600.07,268.84 ; 1603,292.1 cw(c1622.16,292.1) R44.1@1608.61,305.65 ; 1603,292.1 cw(c1622.16,292.1) R44.1@1608.61,305.65 ; 1603,292.1 cw(c1622.16,292.1) R44.1@1608.61,305.65
  Bottom Layer w12: 1340,827 1341,826 v1@1341,812 ; 1352,812 v1@1341,812 ; U7.4@1365,760 1365,809.13 v1(1334,840.13) ; v1(1365,805) v1(1334,805) v1(1334,840.13) ; v1@1428.82,719.18 ccw(c1401.82,746.18) U7.7@1440,746.18 ; v1@1431.73,720.49 ccw(c1431.2,729.28) 1440,729.28 ; C22.2@1440,821.15 1440,801 ; 1459.5,830.5 1459.5,843.5 ; C28.2@1459.5,883 1459.5,843.5 ; C28.2@1464.63,887.87 1464.63,866 ; C28.2@1471,880 1471,819 ; v1@1479,813.5 1479,884 ; 1488,893 1479,884 ; v1@1334,835.63 cw(c1334,824.77) 1341.68,832.45 ; v1@1334,835.63 cw(c1334,824.77) 1341.68,832.45 ; v1@1334,835.63 cw(c1334,824.77) 1341.68,832.45 ; v1(1334,840.13) 1350,824.13 1350,821 v1@1341,812 ; v1@1338.5,840.13 ccw(c1349.36,840.13) 1341.68,832.45 ; v1@1338.5,840.13 ccw(c1349.36,840.13) 1341.68,832.45 ; v1@1338.5,840.13 ccw(c1349.36,840.13) 1341.68,832.45 ; 1354.39,819.74 cw(c1339.65,805) v1@1360.5,805 ; 1354.39,819.74 cw(c1339.65,805) v1@1360.5,805 ; 1354.39,819.74 cw(c1339.65,805) v1@1360.5,805 ; v1@1361.82,801.82 cw(c1354.14,794.14) 1365,794.14 ; v1@1361.82,801.82 cw(c1354.14,794.14) 1365,794.14 ; v1@1361.82,801.82 cw(c1354.14,794.14) 1365,794.14 ; 1365,794.14 cw(c1375.86,794.14) v1@1368.18,801.82 ; 1365,794.14 cw(c1375.86,794.14) v1@1368.18,801.82 ; 1365,794.14 cw(c1375.86,794.14) v1@1368.18,801.82 ; v1@1435.82,719.18 ccw(c1425.72,729.28) 1440,729.28 ; v1@1435.82,719.18 ccw(c1425.72,729.28) 1440,729.28 ; v1@1435.82,719.18 ccw(c1425.72,729.28) 1440,729.28 ; 1440,729.28 U7.7@1440,760 1440,801 ; 1440,801 1471,801 v1(1480,810) 1471,819 ; 1440,805.24 cw(c1463.84,805.24) C22.2@1446.98,822.1 ; 1440,805.24 cw(c1463.84,805.24) C22.2@1446.98,822.1 ; 1440,805.24 cw(c1463.84,805.24) C22.2@1446.98,822.1 ; 1447.41,801 ccw(c1447.41,842.59) v1@1476.82,813.18 ; 1447.41,801 ccw(c1447.41,842.59) v1@1476.82,813.18 ; 1447.41,801 ccw(c1447.41,842.59) v1@1476.82,813.18 ; C22.2@1447.99,822.1 cw(c1455.9,814.19) 1455.9,825.37 ; C22.2@1447.99,822.1 cw(c1455.9,814.19) 1455.9,825.37 ; C22.2@1447.99,822.1 cw(c1455.9,814.19) 1455.9,825.37 ; C22.2@1447.99,828.64 ccw(c1455.9,836.55) 1455.9,825.37 ; C22.2@1447.99,828.64 ccw(c1455.9,836.55) 1455.9,825.37 ; C22.2@1447.99,828.64 ccw(c1455.9,836.55) 1455.9,825.37 ; C22.2@1449.35,825.37 cw(c1468.62,825.37) 1454.99,838.99 ; C22.2@1449.35,825.37 cw(c1468.62,825.37) 1454.99,838.99 ; C22.2@1449.35,825.37 cw(c1468.62,825.37) 1454.99,838.99 ; C28.2@1453.14,886.64 cw(c1437.77,871.27) 1459.5,871.27 ; C28.2@1453.14,886.64 cw(c1437.77,871.27) 1459.5,871.27 ; C28.2@1453.14,886.64 cw(c1437.77,871.27) 1459.5,871.27 ; C28.2@1454.26,885.68 cw(c1439.84,865.52) 1464.63,865.52 ; C28.2@1454.26,885.68 cw(c1439.84,865.52) 1464.63,865.52 ; C28.2@1454.26,885.68 cw(c1439.84,865.52) 1464.63,865.52 ; 1459.5,843.5 1444.22,828.21 C22.2@1444.22,825.37 1464.63,825.37 ; 1459.5,871.27 cw(c1481.23,871.27) C28.2@1465.86,886.64 ; 1459.5,871.27 cw(c1481.23,871.27) C28.2@1465.86,886.64 ; 1459.5,871.27 cw(c1481.23,871.27) C28.2@1465.86,886.64 ; 1464.63,825.37 1471,819 ; 1464.63,825.37 1464.63,866 ; 1464.63,866 1464.63,869.63 1479,884 ; 1470.42,875.42 cw(c1502,843.84) v1@1502,888.5 ; 1470.42,875.42 cw(c1502,843.84) v1@1502,888.5 ; 1470.42,875.42 cw(c1502,843.84) v1@1502,888.5 ; 1472.32,817.68 cw(c1464.64,810) v1@1475.5,810 ; 1472.32,817.68 ccw(c1480,825.36) v1@1480,814.5 ; 1472.32,817.68 cw(c1464.64,810) v1@1475.5,810 ; 1472.32,817.68 ccw(c1480,825.36) v1@1480,814.5 ; 1472.32,817.68 ccw(c1480,825.36) v1@1480,814.5 ; 1472.32,817.68 cw(c1464.64,810) v1@1475.5,810 ; 1481,886 cw(c1492.53,874.47) v1@1499.95,888.99 ; 1481,886 cw(c1492.53,874.47) v1@1499.95,888.99 ; 1481,886 cw(c1492.53,874.47) v1@1499.95,888.99 ; 1490.9,895.9 cw(c1502,884.81) v1@1502,900.5 ; 1490.9,895.9 cw(c1502,884.81) v1@1502,900.5 ; 1490.9,895.9 cw(c1502,884.81) v1@1502,900.5